# EAGLE board NSE2024_MORIMORI (EAGLE 9.6.2)
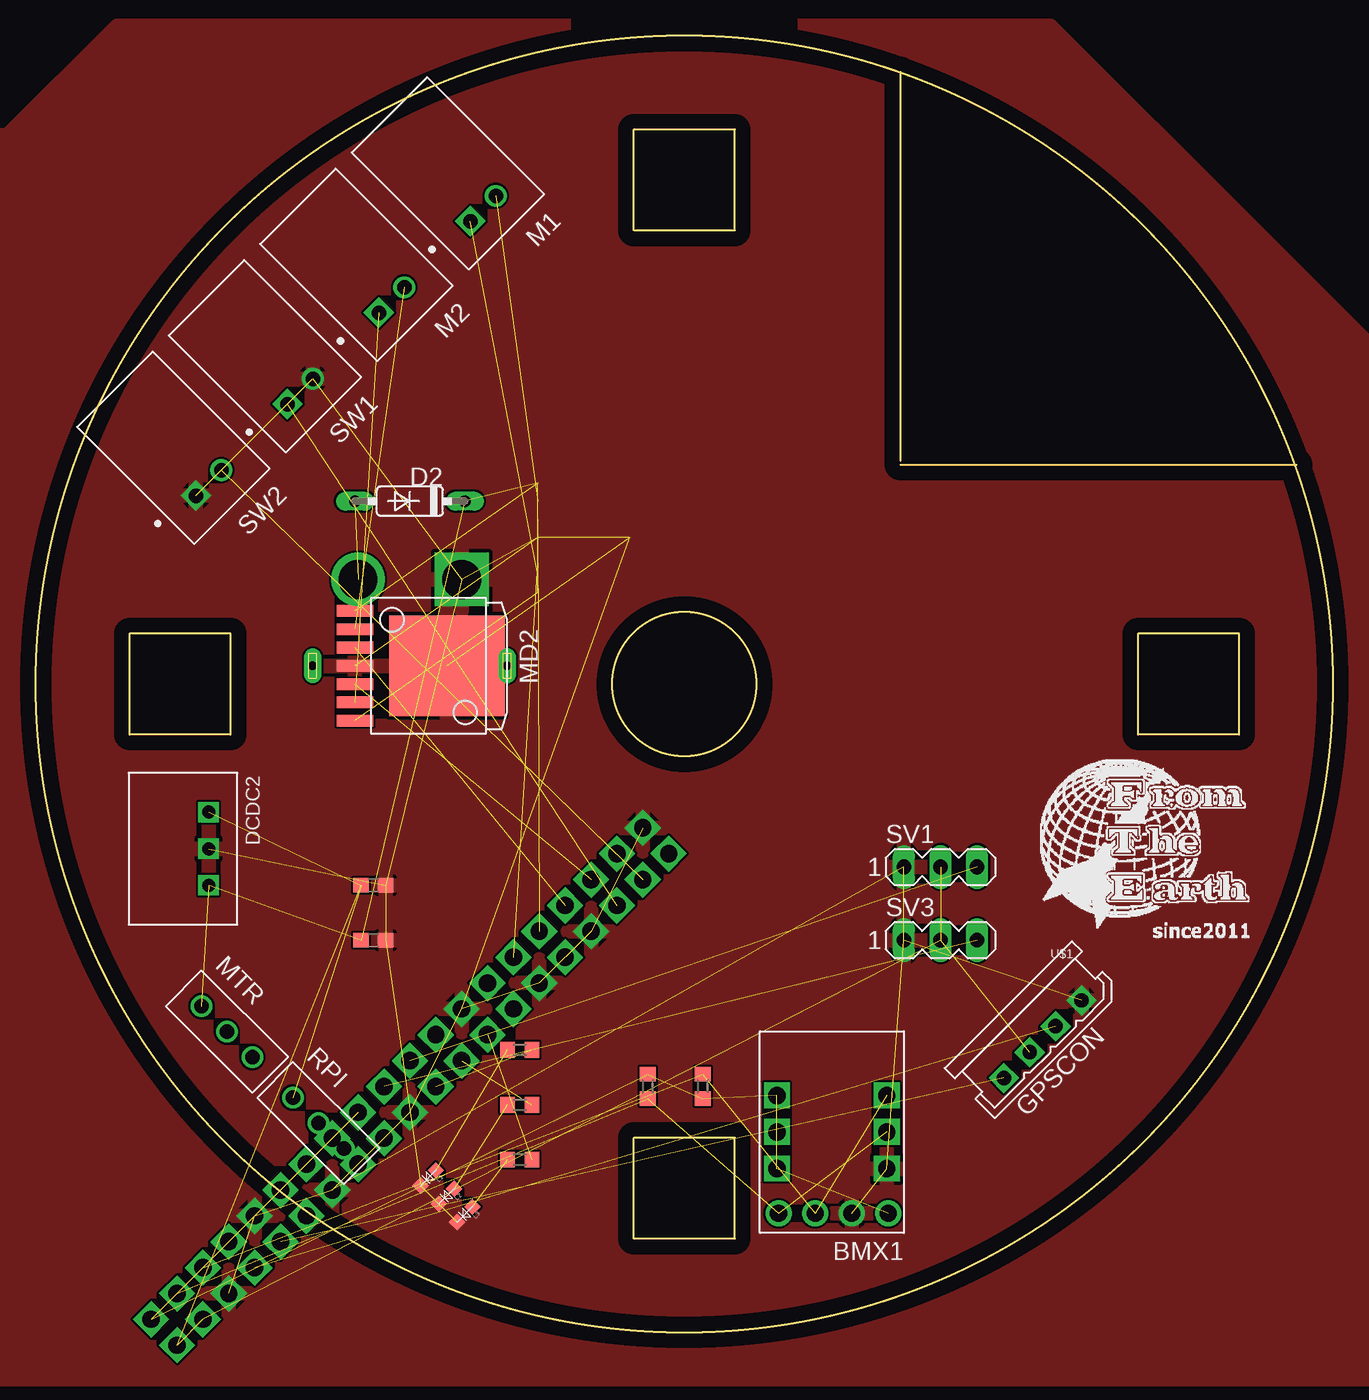
[diagram p0: board, top side]
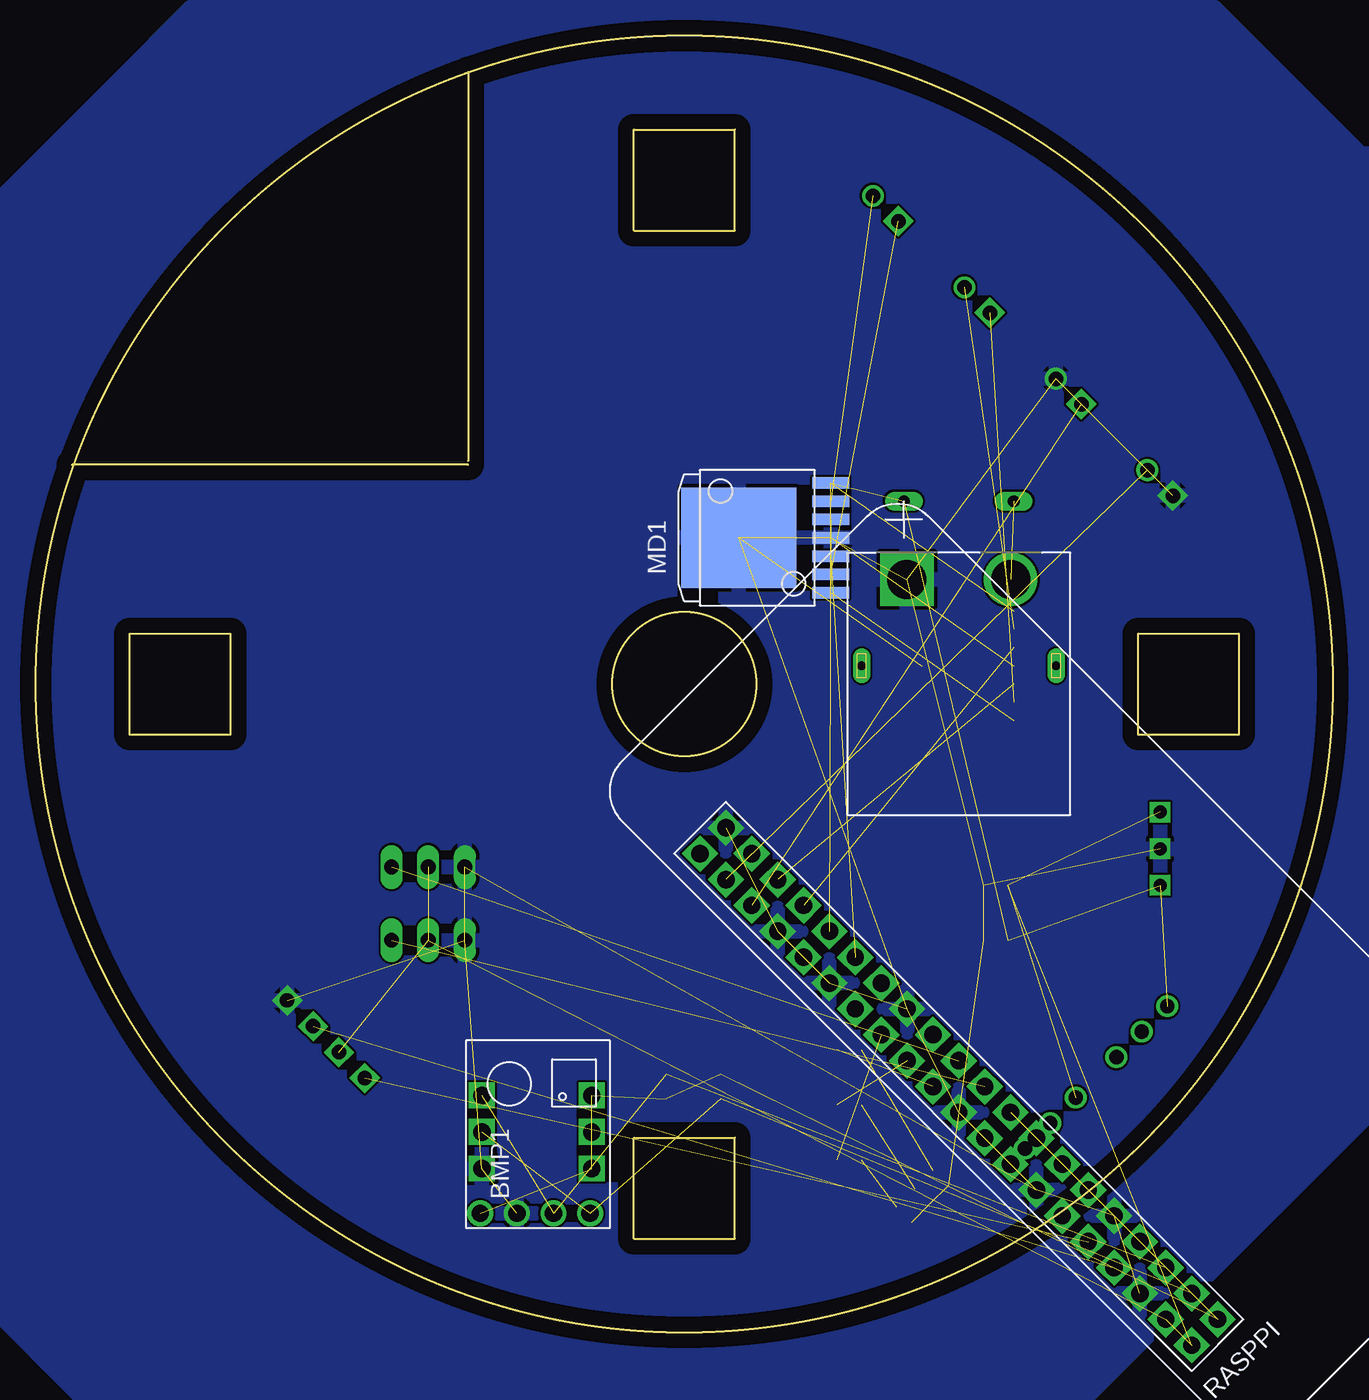
[diagram p1: board, bottom side, seen from below]

Size 90 x 90 mm. Coordinates in mm from the lower left corner, seen from the top.
Outline: 60,87.5 60,60.5
Outline: 60,60.24 87.5,60.24
Outline: 48.5,83.5 41.5,83.5 41.5,76.5 48.5,76.5 48.5,83.5
Outline: 48.5,13.5 41.5,13.5 41.5,6.5 48.5,6.5 48.5,13.5
Outline: 83.5,48.5 76.5,48.5 76.5,41.5 83.5,41.5 83.5,48.5
Outline: 13.5,48.5 6.5,48.5 6.5,41.5 13.5,41.5 13.5,48.5
Outline: circle at 45,45 radius 45
Outline: circle at 45,45 radius 5
Copper layers (1*16): Top 0.035mm / dielectric 1.5mm / Bottom 0.035mm
Design rules "default": minimum track width 6mil, minimum drill 0.35mm, track to track 6mil, track to pad 6mil, pad to pad 6mil, via to via 6mil, smd to smd 6mil, copper to edge 40mil, drill to drill 6mil, minimum pad ring 10mil, minimum via ring 8mil, stop-mask expansion 4mil, vias tented up to drill 0mil, thermal gap 10mil
Net classes: 1 power: width 0.762 mm

## Footprints (pad centres in the part's own frame; a part is rotated, then mirrored left to right if it is on the bottom)
GY-68 = drill 1.2: P1 -5,4; P2 -5,1.46; P3 -5,-1.08; P4 -5,-3.62
BMX055 = drill 1.2 pad 1.5 square: 3V3 8.81,-9.53; GND 1.19,-4.46; SCL 1.19,-9.53; SDA 1.19,-7; VCC 8.81,-4.46; VCCIO 8.81,-7
C0603 = smd 1.1 x 1: 1 -0.85,0; 2 0.85,0
DO35-7 = drill 0.813 long: A 3.81,0; C -3.81,0
3.3V1A_M78AR033-1 = drill 0.9 pad 1.27 square: GND 0,0; VIN 2.54,0; VOUT -2.54,0
2.5_MINI-SPOX_4PIN = drill 1 square: P$1 -1.27,0; P$2 6.35,0; P$3 1.27,0; P$4 3.81,0
OSXX1608C1A = smd 0.8 x 0.8: AN -0.75,0; CT 0.75,0
JST_S2B-XH-A(LF)(SN) = drill 1 square: 1 -1.25,0 | drill 1: 2 1.25,0
BD6222HFP-TR = smd 7 x 8: BGND 0,6.378 | smd 0.8 x 2.54: FIN -1.27,0; GND 0,0; OUT1 -2.54,0; OUT2 2.54,0; RIN 1.27,0; VCC 3.81,0; VREV -3.81,0
SRIDE_SWITCH = drill 1: L -2.5,0; LR 0,0; R 2.5,0
AMASS_XT60PW-M = drill 2.7 square: 1 3.6,-6 | drill 2.7: 2 -3.6,-6 | drill 0.6 pad 1.2 long: S1 6.75,0; S2 -6.75,0
R0603 = smd 1 x 1.1: 1 -0.85,0; 2 0.85,0
RASPBERYPIZEROW = drill 1.2 pad 1.676 square: 3.3V1 -1.27,24.13; 3.3V2 -1.27,3.81; 5V1 1.27,24.13; 5V2 1.27,21.59; GND1 -1.27,13.97; GND2 -1.27,-6.35; GND3 -1.27,-24.13; GND4 1.27,19.05; GND5 1.27,8.89; GND6 1.27,1.27; GND7 1.27,-11.43; GND8 1.27,-16.51; GPIO2 -1.27,21.59; GPIO3 -1.27,19.05; GPIO4 -1.27,16.51; GPIO5 -1.27,-11.43; GPIO6 -1.27,-13.97; GPIO7 1.27,-6.35; GPIO8 1.27,-3.81; GPIO9 -1.27,-1.27; GPIO10 -1.27,1.27; GPIO11 -1.27,-3.81; GPIO12 1.27,-13.97; GPIO13 -1.27,-16.51; GPIO14 1.27,16.51; GPIO15 1.27,13.97; GPIO16 1.27,-19.05; GPIO17 -1.27,11.43; GPIO18 1.27,11.43; GPIO19 -1.27,-19.05; GPIO20 1.27,-21.59; GPIO21 1.27,-24.13; GPIO22 -1.27,6.35; GPIO23 1.27,6.35; GPIO24 1.27,3.81; GPIO25 1.27,-1.27; GPIO26 -1.27,-21.59; GPIO27 -1.27,8.89; ID_SC 1.27,-8.89; ID_SD -1.27,-8.89
MA03-1 = drill 1.016 long: 1 -2.54,0; 2 0,0; 3 2.54,0

## Placement (x,y rotation side)
BMP1  BMP180  [GY-68]  55.16,13.25 90 bottom
BMX1  BMX055  [BMX055]  60.24,6.9 180 top
C1  10μF  [C0603]  23.41,31.03 0 top
C3  10μF  [C0603]  23.41,27.22 0 top
D2  1N4148DO35-7  [DO35-7]  25.95,57.7 180 top
DCDC2  [3.3V1A_M78AR033-1]  11.98,33.57 270 top
GPSCON  [2.5_MINI-SPOX_4PIN]  71.67,22.14 225 top
L1  [OSXX1608C1A]  27.22,10.71 225 top
L2  [OSXX1608C1A]  28.49,9.44 225 top
L3  [OSXX1608C1A]  29.76,8.17 225 top
M1  S2B-XH-A(LF)(SN)  [JST_S2B-XH-A(LF)(SN)]  31.03,78.02 45 top
M2  S2B-XH-A(LF)(SN)  [JST_S2B-XH-A(LF)(SN)]  24.68,71.67 45 top
MD1  [BD6222HFP-TR]  34.84,55.16 90 bottom
MD2  [BD6222HFP-TR]  22.14,46.27 270 top
MTR  SRIDE_SWITCH  [SRIDE_SWITCH]  13.25,20.87 315 top
POWER  XT60PW-M  [AMASS_XT60PW-M]  25.95,46.27 180 bottom
R4  1k  [R0603]  46.27,17.06 90 top
R6  1k  [R0603]  42.46,17.06 270 top
R7  100  [R0603]  33.57,15.79 180 top
R12  100  [R0603]  33.57,19.6 180 top
R14  100  [R0603]  33.57,11.98 180 top
RASPPI  RASPBERYPIZEROW  [RASPBERYPIZEROW]  25.95,17.06 225 bottom
RPI  SRIDE_SWITCH  [SRIDE_SWITCH]  19.6,14.52 315 top
SV1  [MA03-1]  62.78,32.3 0 top
SV3  [MA03-1]  62.78,27.22 0 top
SW1  S2B-XH-A(LF)(SN)  [JST_S2B-XH-A(LF)(SN)]  18.33,65.32 45 top
SW2  S2B-XH-A(LF)(SN)  [JST_S2B-XH-A(LF)(SN)]  11.98,58.97 45 top
U$1  F.T.E.LOGO  [LOGO]  69.13,25.95 0 top

## Library data of the parts
BMP1 = BMP180
BMX1 = BMX055
C1 C3 = rcl; SPICEPREFIX: C
D2 = diode
DCDC2 = DC-DC
GPSCON = Connector
L1-L3 = Chip LED
M1 M2 SW1 SW2 = S2B-XH-A_LF__SN_; AVAILABILITY: In Stock; CHECK_PRICES: https://www.snapeda.com/parts/S2B-XH-A(LF)(SN)/JST+Sales+America+Inc./view-part/?ref=eda; DESCRIPTION: Connector Header Through Hole, Right Angle 2 position 0.098 (2.50mm); MF: JST Sales America Inc.; MP: S2B-XH-A(LF)(SN); PACKAGE: None; PRICE: None; SNAPEDA_LINK: https://www.snapeda.com/parts/S2B-XH-A(LF)(SN)/JST+Sales+America+Inc./view-part/?ref=snap
MD1 MD2 = BD6222HFP-TR
MTR RPI = Sride Switch
POWER = XT60PW-M; AVAILABILITY: Not in stock; CHECK_PRICES: https://www.snapeda.com/parts/XT60PW-M/AMASS/view-part/?ref=eda; DESCRIPTION: Socket, DC supply, male, PIN: 2; MF: AMASS; MP: XT60PW-M; PACKAGE: Package; PRICE: None; SNAPEDA_LINK: https://www.snapeda.com/parts/XT60PW-M/AMASS/view-part/?ref=snap
R4 R6 R7 R12 R14 = rcl; SPICEPREFIX: R
RASPPI = RaspberyPiZeroW
SV1 SV3 = con-lstb; OC_FARNELL: unknown; OC_NEWARK: unknown
U$1 = logo

## Nets
+3V3: BMP1.P1 BMX1.3V3 BMX1.VCC BMX1.VCCIO R4.1 R6.1 RASPPI.3.3V1 RASPPI.3.3V2
+5V: C1.1 DCDC2.VOUT GPSCON.P$4 RASPPI.5V1 RASPPI.5V2 RPI.L SV1.2 SV3.2
+12V: C3.1 D2.C DCDC2.VIN MD1.VCC MD1.VREV MD2.VCC MD2.VREV MTR.L
GND: BMP1.P2 BMX1.GND C1.2 C3.2 DCDC2.GND GPSCON.P$1 L1.CT L2.CT L3.CT MD1.BGND MD1.GND MD2.BGND MD2.GND POWER.1 RASPPI.GND1 RASPPI.GND2 RASPPI.GND3 RASPPI.GND4 RASPPI.GND5 RASPPI.GND6 RASPPI.GND7 RASPPI.GND8 SV1.1 SV3.1 SW1.2 SW2.1
GPS_RX: GPSCON.P$2 RASPPI.GPIO15
GPS_TX: GPSCON.P$3 RASPPI.GPIO14
LED0: R12.1 RASPPI.GPIO25
LED1: R7.1 RASPPI.GPIO8
LED2: R14.1 RASPPI.GPIO7
MD1_F: MD1.FIN RASPPI.GPIO5
MD1_O1: M1.1 MD1.OUT1
MD1_O2: M1.2 MD1.OUT2
MD1_R: MD1.RIN RASPPI.GPIO6
MD2_F: MD2.FIN RASPPI.GPIO13
MD2_O1: M2.2 MD2.OUT1
MD2_O2: M2.1 MD2.OUT2
MD2_R: MD2.RIN RASPPI.GPIO19
MTRPW: MTR.LR
N$1: D2.A POWER.2
N$2: L1.AN R12.2
N$3: L2.AN R7.2
N$4: L3.AN R14.2
PWM: RASPPI.GPIO10 SV3.3
PWM1: RASPPI.GPIO9 SV1.3
RPIPW: RPI.LR
SCL: BMP1.P3 BMX1.SCL R4.2 RASPPI.GPIO3
SDA: BMP1.P4 BMX1.SDA R6.2 RASPPI.GPIO2
SW1: RASPPI.GPIO16 SW1.1
SW2: RASPPI.GPIO20 SW2.2

## Tracks (layer width: path | path; a pad name or v marks a point on that pad's centre or on a via)
+3V3  (7 unrouted)
+5V  (7 unrouted)
+12V  (7 unrouted)
GND  (25 unrouted)
  pour Bottom: -4.53,81.83 -4.53,17.06 22.14,-9.61 81.83,-9.61 98.34,6.9 98.34,72.94 84.37,86.91 79.29,91.99 8.17,91.99 -1.99,81.83
  pour Top: -5.8,83.1 -5.8,-0.72 -8.34,-3.26 98.34,-3.26 102.15,0.55 102.15,58.97 84.37,76.75 70.4,90.72 5.63,90.72 -1.99,83.1
GPS_RX  (1 unrouted)
GPS_TX  (1 unrouted)
LED0  (1 unrouted)
LED1  (1 unrouted)
LED2  (1 unrouted)
MD1_F  (1 unrouted)
MD1_O1  (1 unrouted)
MD1_O2  (1 unrouted)
MD1_R  (1 unrouted)
MD2_F  (1 unrouted)
MD2_O1  (1 unrouted)
MD2_O2  (1 unrouted)
MD2_R  (1 unrouted)
N$1  (1 unrouted)
N$2  (1 unrouted)
N$3  (1 unrouted)
N$4  (1 unrouted)
PWM  (1 unrouted)
PWM1  (1 unrouted)
SCL  (3 unrouted)
SDA  (3 unrouted)
SW1  (1 unrouted)
SW2  (1 unrouted)